# Altium PCB nuc5v1.PcbDoc
Units mm, origin at the board's own origin, x right, y up, seen from the top; angles counter-clockwise.
Board outline 152.4 x 101.6 mm, 2 copper layers (Top Layer, Bottom Layer); 67 components, 68 nets, 259 pads, 158 vias.
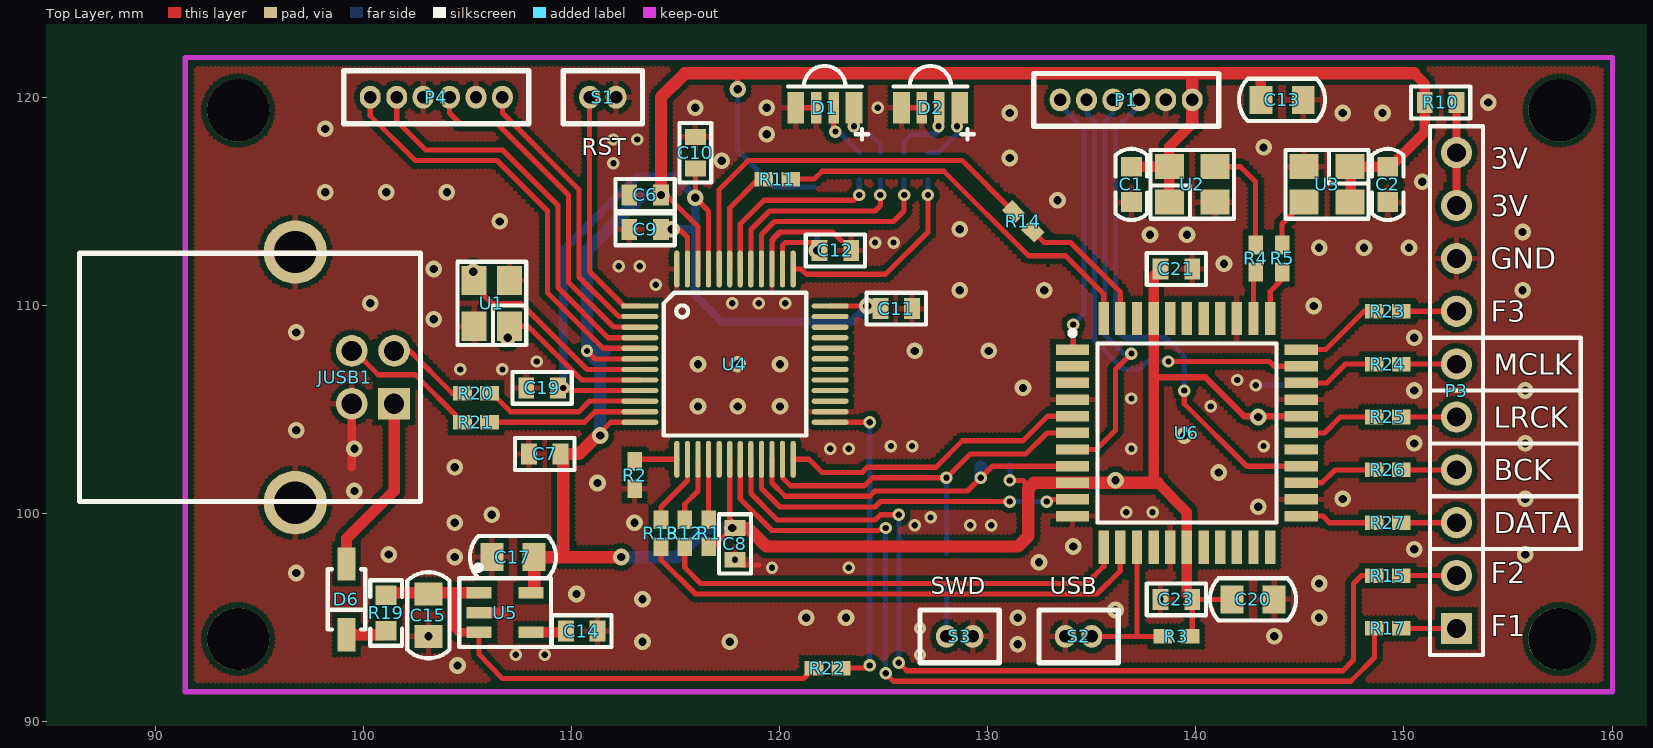
[diagram p0: Top Layer view]
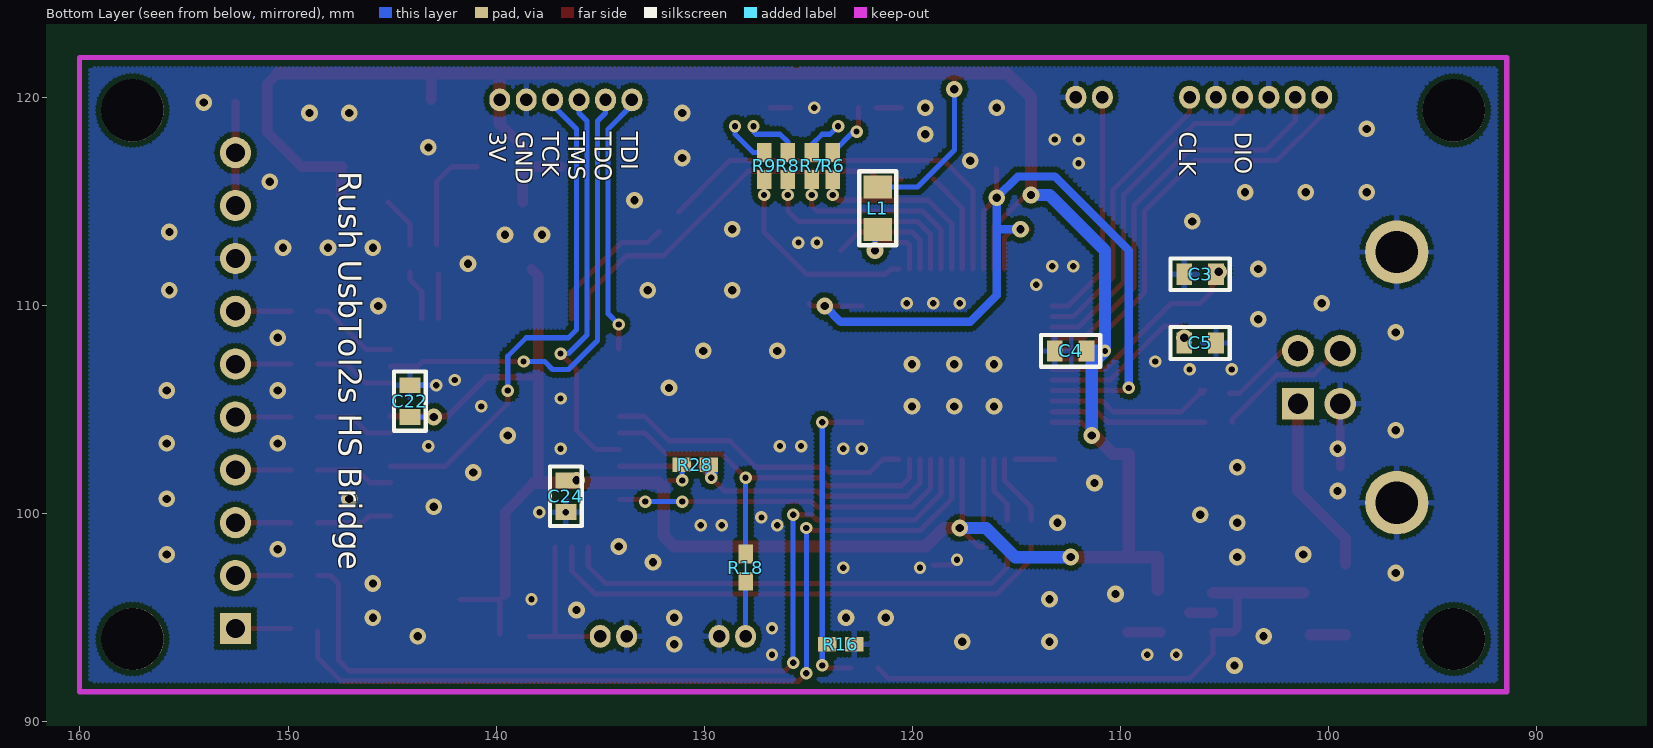
[diagram p1: Bottom Layer view, seen from below]

## Layer stack, top to bottom
Top Layer: signal copper 0.0356
Dielectric: dielectric 0.32, FR-4, Dk 4.8
Bottom Layer: signal copper 0.0356

## Board outline
25.4,25.4 177.8,25.4 177.8,127 25.4,127

## Design rules (kind name [scope] priority, off if disabled: settings)
Clearance Clearance_1 [All] p1: gap=0.254
Clearance [(InComponent('U1'))] p2: gap=0.1
ComponentClearance [All] p1 off: gap=0.254 collisioncheckmode=3 verticalgap=0.254
FanoutControl Fanout_BGA [IsBGA] p1 off: bgadir=Out bgaviamode=Centered fanoutstyle=Auto fanoutdirection=Alternating viagrid=0.025 // Fanout_BGA (Default Rule)
FanoutControl Fanout_LCC [IsLCC] p2 off: bgadir=Out bgaviamode=Centered fanoutstyle=Auto fanoutdirection=Alternating viagrid=0.025 // Fanout_LCC (Default Rule)
FanoutControl Fanout_SOIC [IsSOIC] p3 off: bgadir=Out bgaviamode=Centered fanoutstyle=Auto fanoutdirection=Alternating viagrid=0.025 // Fanout_SOIC (Default Rule)
FanoutControl Fanout_Small [(CompPinCount < 5)] p4 off: bgadir=Out bgaviamode=Centered fanoutstyle=Auto fanoutdirection=OutThenIn viagrid=0.025 // Fanout_Small (Default Rule)
FanoutControl Fanout_Default [All] p5 off: bgadir=Out bgaviamode=Centered fanoutstyle=Auto fanoutdirection=Alternating viagrid=0.025 // Fanout_Default (Default Rule)
Height [All] p1 off: minheight=0 maxheight=25.4 prefheight=12.7
HoleSize [All] p1 off: absolutevalues=TRUE maxlimit=2.54 minlimit=0.025 maxpercent=80.000 minpercent=20.000
LayerPairs [All] p1 off: enforce=TRUE
PasteMaskExpansion [All] p1 off: expansion=0
PolygonConnect [All] p1: connectstyle=Relief reliefconductorwidth=0.254 reliefentries=4 polygonreliefangle="90 Angle"
RoutingCorners [All] p1 off: cornerstyle=45-Degree minsetback=2.54 maxsetback=2.54
RoutingLayers [All] p1 off: top layer_v5=TRUE bottom layer_v5=TRUE
RoutingPriority [All] p1 off: routingpriority=0
RoutingTopology [All] p1 off: topology=Shortest
RoutingVias [All] p1: holewidth=0.711 width=1.27 viastyle="Through Hole" minholewidth=0.711 minwidth=1.27 maxholewidth=0.711 maxwidth=1.27
SolderMaskExpansion [All] p1 off: expansion=0.102
TestPointUsage [All] p1 off: valid=0 allowmultiple=FALSE
Testpoint [All] p1 off: side=15 testpointundercomponent=TRUE minsize=1.016 maxsize=2.54 preferedsize=1.524 minholesize=0 maxholesize=1.016 preferedholesize=0.813 testpointgrid=0.025 style=1023 order=0-112345678
Width [All] p1: maxlimit=1 minlimit=0.2 preferedwidth=0.3 toplayer_prefwidth=0.25 bottomlayer_prefwidth=0.25 minimp=50.000000 maximp=50.000000 favimp=50.000000
4 further rules are at their usual default settings.

## Components (designator, comment, footprint, x,y, rotation, side; value= is the part's Value field where it differs from the comment)
C1 "104" CC0603CAP 136.906,115.824 r90 top
C2 "104" CC0603CAP 149.225,115.824 r270 top
C3 "22p" 0603 105.41,111.506 r0 bottom
C4 "0.1" 0603 111.633,107.823 r0 bottom
C5 "22p" 0603 105.41,108.204 r0 bottom
C6 "0.1" 0603 114.3,115.316 r180 top
C7 "0.1" 0603 107.95,102.87 r0 top
C8 "0.1" 0603 117.856,99.314 r270 top
C9 "0.1" 0603 114.3,113.665 r180 top
C10 "0.1" 0603 115.951,116.586 r90 top
C11 "4.7u" 0603 124.841,109.855 r0 top
C12 "1" 0603 121.92,112.649 r0 top
C13 "10uF" CC0805CAP 144.145,119.888 r180 top
C14 "0.1" 0603 109.728,94.361 r0 top
C15 "10uF" CC0805CAP 103.124,95.123 r90 top
C17 "10uF" CC0805CAP 107.188,97.917 r0 top
C19 "0.1" 0603 109.347,106.045 r180 top
C20 "10u" CC0805CAP 142.748,95.885 r0 top
C21 "0.1" 0603 139.827,111.76 r180 top
C22 "0.1" 0603 144.145,106.172 r270 bottom
C23 "0.1" 0603 138.303,95.885 r0 top
C24 "0.1" 0603 136.652,100.076 r90 bottom
D1 "DLED" LED1204 122.174,119.507 r270 top
D2 "DLED" LED1204 127.254,119.507 r270 top
D6 "MBR520" SOD123 99.187,95.885 r90 top
JUSB1 "USB_B" USB-B-M 101.473,105.283 r90 top
L1 "10uH" CC0805RES 121.666,114.681 r270 bottom
P1 "Header 6" 密脚针1.27mm*6 133.477,119.888 r0 top
P3 "Header 10" HDR1X10 152.527,94.488 r90 top locked
P4 "Header 6" 密脚针1.27mm*6 100.33,120.015 r0 top
R1 "10K" CR1005-0402 116.586,99.06 r270 top
R2 "12.1K 1%" CR1005-0402 113.03,101.854 r270 top
R3 "1K" CR1005-0402 139.065,94.107 r0 top
R4 "22" CR1005-0402 142.875,112.268 r270 top
R5 "22" CR1005-0402 144.145,112.268 r270 top
R6 "2.2k" CR1005-0402 123.825,116.713 r90 bottom
R7 "10k" CR1005-0402 124.841,116.713 r90 bottom
R8 "2.2k" CR1005-0402 125.984,116.713 r90 bottom
R9 "10k" CR1005-0402 127.127,116.713 r90 bottom
R10 "0" 0603 151.003,119.761 r0 top
R11 "220" CR1005-0402 119.888,116.078 r0 top
R12 "220" CR1005-0402 115.443,99.06 r90 top
R13 "220" CR1005-0402 114.3,99.06 r270 top
R14 "220" CR1005-0402 131.699,114.046 r135 top
R15 "220" CR1005-0402 149.225,97.028 r180 top
R16 "20K" CR1005-0402 123.444,93.726 r0 bottom
R17 "220" CR1005-0402 149.225,94.488 r180 top
R18 "1K" CR1005-0402 128.016,97.409 r270 bottom
R19 "2.2" CC0603RES 101.092,95.231 r90 top
R20 "22" CR1005-0402 105.41,105.791 r180 top
R21 "22" CR1005-0402 105.41,104.394 r180 top
R22 "20K" CR1005-0402 122.301,92.583 r180 top
R23 "220" CR1005-0402 149.225,109.728 r0 top
R24 "220" CR1005-0402 149.225,107.188 r180 top
R25 "220" CR1005-0402 149.225,104.648 r180 top
R26 "220" CR1005-0402 149.225,102.108 r0 top
R27 "220" CR1005-0402 149.225,99.568 r0 top
R28 "10K" CR1005-0402 130.429,102.362 r0 bottom
S1 "RESET" 密脚针1.27mm*2 112.141,120.015 r180 top
S2 "USBOOT" 密脚针1.27mm*2 133.731,94.107 r0 top
S3 "SWBOOT" 密脚针1.27mm*2 129.286,94.107 r180 top
U1 "12M 3225" OSC-3225 106.172,110.109 r90 top
U2 "7050 OSC" OSC-3225 139.827,115.824 r0 top
U3 "7050 OSC" OSC-3225 146.304,115.824 r180 top
U4 "NUC505YL" LQFP-48 113.284,109.982 r270 top
U5 "LDO3.3V" SOT23-5 106.807,95.25 r90 top
U6 "EPM3032A" TQFP44 139.573,103.886 r0 top

## Footprints (in the part's own frame and the unit in brackets; to place one, negate y for a bottom-side part, rotate by r counter-clockwise, add the part's x,y. Pads: shape width x height; smd on the part's side, far side on the other; paste and mask are expansions set on the pad)
0603 [mil]
  rect 30x40 smd: 1(0,0) 2(60,0)
  silkscreen extent -26,-30 86,30
CC0603CAP [mm]
  rect 0.95x1 smd: 1(-0.85,0) 2(0.85,0)
  silkscreen extent -1.71,-0.76 1.71,0.76
CC0603RES [mm]
  rect 0.95x1 smd: 1(-0.85,0) 2(0.85,0)
  silkscreen extent -1.57,-0.76 1.57,0.76
CC0805CAP [mm] "Chip Capacitor; Body 2.0 x 1.2 mm (LxW typ)"
  rect 1.1x1.35 smd: 1(-1.016,0) 2(1.016,0)
  silkscreen extent -2.07,-1.02 2.07,1.02
CC0805RES [mm] "Chip Capacitor; Body 2.0 x 1.2 mm (LxW typ)"
  rect 1.1x1.35 smd: 1(-1.016,0) 2(1.016,0)
  silkscreen extent -1.78,-0.89 1.78,0.89
CR1005-0402 [mm] "Chip Resistor; Body 1.1 x 0.5 mm (LxW typ)"
  rect 0.9x0.7 smd: 1(-0.65,0) 2(0.65,0)
HDR1X10 [mm] "Connector; Header; 10 Position"
  rect 1.5x1.5 hole 0.9: 1(0,0)
  round 1.5 hole 0.9: 2(2.54,0) 3(5.08,0) 4(7.62,0) 5(10.16,0) 6(12.7,0) 7(15.24,0) 8(17.78,0) 9(20.32,0) 10(22.86,0)
  silkscreen extent -1.27,-1.27 24.13,1.27
LED1204 [mm]
  rect 1.5x0.5 smd: 1(0,-0.42) 2(0,0.42)
  rect 1.5x0.8 smd: 3(0,-1.4) 4(0,1.4)
  silkscreen extent -2.01,-1.78 1.52,2.08
LQFP-48 [mil]
  rect 10x70 smd: 1(0,0)
  oval 10x70 smd: 2(20,0) 3(40,0) 4(60,0) 5(80,0) 6(100,0) 7(120,0) 8(140,0) 9(160,0) 10(180,0) 11(200,0) 12(220,0) 25(220,360) 26(200,360) 27(180,360) 28(160,360) 29(140,360) 30(120,360) 31(100,360) 32(80,360) 33(60,360) 34(40,360) 35(20,360) 36(0,360)
  oval 70x10 smd: 13(290,70) 14(290,90) 15(290,110) 16(290,130) 17(290,150) 18(290,170) 19(290,190) 20(290,210) 21(290,230) 22(290,250) 23(290,270) 24(290,290) 37(-70,290) 38(-70,270) 39(-70,250) 40(-70,230) 41(-70,210) 42(-70,190) 43(-70,170) 44(-70,150) 45(-70,130) 46(-70,110) 47(-70,90) 48(-70,70)
  silkscreen extent -25,45 245,315
OSC-3225 [mm] "3225晶振"
  rect 1.4x1.2 smd: 1(-1.1,-0.85) 2(1.1,-0.85) 3(1.1,0.85) 4(-1.1,0.85)
  silkscreen extent -2,-1.65 2,1.65
SOD123 [mm] "SOD-123; 2 Leads; Body 2.7 x 1.6 mm, (LxW)"
  rect 1.6x0.85 smd: 1(1.7,0) 2(-1.7,0)
  silkscreen extent -1.45,-0.9 1.45,0.9
SOT23-5 [mm] "SOT-23/SC-74A; 5 Leads; Body 3.1 x 3.1 mm, inc. leads (LxW max)"
  rect 0.55x1.2 smd: 1(0.95,1.25) 2(0,1.25) 3(-0.95,1.25) 4(-0.95,-1.25) 5(0.95,-1.25)
  silkscreen extent -1.65,-2.2 2.29,2.2
TQFP44 [mm] "44-Pin Plastic Thin Quad Flat Pack (TFQP)"
  rect 1.6x0.5 smd: 1(-5.5,4) 2(-5.5,3.2) 3(-5.5,2.4) 4(-5.5,1.6) 5(-5.5,0.8) 6(-5.5,0) 7(-5.5,-0.8) 8(-5.5,-1.6) 9(-5.5,-2.4) 10(-5.5,-3.2) 11(-5.5,-4) 23(5.5,-4) 24(5.5,-3.2) 25(5.5,-2.4) 26(5.5,-1.6) 27(5.5,-0.8) 28(5.5,0) 29(5.5,0.8) 30(5.5,1.6) 31(5.5,2.4) 32(5.5,3.2) 33(5.5,4)
  rect 0.5x1.6 smd: 12(-4,-5.5) 13(-3.2,-5.5) 14(-2.4,-5.5) 15(-1.6,-5.5) 16(-0.8,-5.5) 17(0,-5.5) 18(0.8,-5.5) 19(1.6,-5.5) 20(2.4,-5.5) 21(3.2,-5.5) 22(4,-5.5) 34(4,5.5) 35(3.2,5.5) 36(2.4,5.5) 37(1.6,5.5) 38(0.8,5.5) 39(0,5.5) 40(-0.8,5.5) 41(-1.6,5.5) 42(-2.4,5.5) 43(-3.2,5.5) 44(-4,5.5)
  silkscreen extent -5.62,-4.3 4.3,4.92
USB-B-M [mil]
  rect 60x60 hole 38: 1(0,0)
  round 60 hole 38: 2(100,0) 3(100,80) 4(0,80)
  round 120 hole 80: 5(-187,187) 5(287,187)
  silkscreen extent -185,-50 285,595
密脚针1.27mm*2 [mm]
  oval 1x1.1 hole 0.6: 1(0,0) 2(1.27,0)
  silkscreen extent -1.27,-1.27 2.54,1.27
密脚针1.27mm*6 [mm]
  oval 1x1.1 hole 0.6: 1(0,0) 2(1.27,0) 3(2.54,0) 4(3.81,0) 5(5.08,0) 6(6.35,0)
  silkscreen extent -1.27,-1.27 7.62,1.27

## Part data
C1 C2: library part Cap6, "Capacitor0603"
C3 C4 C5 C6 C7 C8 C9 C10 C11 C12 C19 C21 C22 C23 C24: library part CAP, "Capacitor"
C13 C14 C15 C17 C20: library part Cap8, "Capacitor0805"
D1 D2: library part LED1204, "1204˫ɫLED"
D6: library part Diode, "Default Diode"
JUSB1: "USB Mini/Micro 5P"
L1: library part Res8, "Resistor0805"
P1 P4: "Header, 6-Pin"
P3: "Header, 10-Pin"
R1 R2 R3 R4 R5 R6 R7 R8 R9 R10 R11 R12 R13 R14 R15 R17 R18 R19 R20 R21 R23 R24 R25 R26 R27 R28: library part Res6, "Resistor0603"
R16 R22: library part R, "贴片电阻"
S1 S2 S3: library part SW-PB
U1: library part XTAL
U2 U3: library part XTAL_OSC
U5: library part LP2985-5, "LP2985 5V LDO"
U6: "CPLD , 44-Pin TQFP"

## Free pads (board coordinates)
  round 3 hole 3 unplated: ""(93.98,93.98) ""(93.98,119.38) ""(157.48,93.98) ""(157.48,119.38)

## Via types
v1: diameter 0.8, hole 0.4, Top Layer to Bottom Layer, 94 vias
v2: diameter 0.6, hole 0.3, Top Layer to Bottom Layer, 64 vias

## Nets (pads, with @x,y where several pads share a name; then routed paths per layer and width w, separated by ;. In a path a pad name is that pad's centre, name@x,y a point inside that pad or via, vN(x,y) a via of type N, cw(c..) or ccw(c..) an arc to the next point about the centre after c; other vN are vias at no path point)
BCK1: R12.1 U6.12 | length 22.7
  Top Layer w0.25: R12.1 115.443,97.409 116.205,96.647 134.747,96.647 135.573,97.473 U6.12
BCK2: R26.1 U6.25 | length 3.8
  Top Layer w0.25: U6.25 146.063,101.486 146.685,102.108 R26.1
BCKO: P3.4 R26.2 | length 2.7
  Top Layer w0.25: R26.2 P3.4
CLK1: R4.1 U2.3 | length 5.3
  Top Layer w0.25: U2.3 142.152,116.674 142.875,115.951 R4.1
CLK1O: R4.2 U6.35 | length 2.1
  Top Layer w0.25: U6.35 R4.2@142.773,111.516
CLK2: R5.1 U3.3 | length 2.5
  Top Layer w0.25: R5.1 144.145,113.915 U3.3
CLK2O: R5.2 U6.34 | length 2.5
  Top Layer w0.25: U6.34 143.573,110.68 144.145,111.252 R5.2
D+: R21.1 U4.11 | length 7.6
  Top Layer w0.25: R21.1@105.933,104.394 110.617,104.394 111.125,104.902 U4.11
D-: R20.1 U4.10 | length 8.1
  Top Layer w0.25: R20.1@105.933,105.918 R20.1@106.172,105.918 ; R20.1@106.045,105.791 106.172,105.791 107.061,104.902 110.363,104.902 110.871,105.41 U4.10
DATAO: P3.3 R27.2 | length 2.7
  Top Layer w0.25: R27.2 P3.3
DATI: R11.2 U6.44 | length 18.8
  Top Layer w0.25: R11.2 121.666,116.078 122.047,116.459 127.889,116.459 131.953,112.395 133.731,112.395 135.573,110.553 U6.44
DATO: R14.1 U6.43 | length 6.7
  Top Layer w0.25: R14.1 132.715,113.03 133.985,113.03 136.373,110.642 U6.43
DM: JUSB1.2 R20.2 | length 4
  Top Layer w0.254: JUSB1.2@101.6,107.823 102.235,107.823 104.267,105.791 R20.2
DP: JUSB1.3 R21.2 | length 6.6
  Top Layer w0.254: JUSB1.3@99.568,107.823 100.711,106.68 102.489,106.68 104.633,104.536 R21.2@104.633,104.394
F1: P3.1 R17.1 | length 2.7
  Top Layer w0.25: R17.1 P3.1
F2: P3.2 R15.1 | length 2.7
  Top Layer w0.25: R15.1 P3.2
F3: P3.7 R23.2 | length 2.7
  Top Layer w0.25: R23.2 P3.7
GND: C1.1 C2.2 C3.2 C4.2 C5.1 C6.2 C7.1 C8.2 C9.2 C10.2 C11.2 C12.2 C13.1 C14.2 C15.1 C17.1 C19.2 C20.2 C21.1 C22.1 C23.1 C24.1 D1.1 D1.3 D2.1 D2.3 JUSB1.4 JUSB1.5 P1.5 P3.8 P4.3 P4.5 R2.2 R16.1 S1.1 S2.1 S3.1 U1.2 U1.4 U2.2 U3.2 U4.26 U4.39 U4.48 U5.2 U6.4 U6.11 U6.16 U6.24 U6.30 U6.36 | length 14.5
  Top Layer w0.25: v2(117.856,97.79) 118.11,97.536 118.999,97.536 ; U4.39 119.634,113.157 120.015,113.538 122.555,113.538 C12.2 ; D1.3@120.523,119.507 D1.1 ; D2.3 D2.1
  Top Layer w0.4: 99.441,102.231 JUSB1.4
  Top Layer w0.5: U5.2 106.705,95.25
  Bottom Layer w0.25: v2@143.002,106.172 C22.1
  other v1: 104.521,92.71 131.445,93.726 113.411,93.853 117.602,93.853 103.124,94.107 143.764,94.107 121.285,94.996 123.19,94.996 131.445,94.996 145.923,94.996 136.144,95.377 113.411,95.885 110.236,96.139 145.923,96.647 96.774,97.155 132.461,97.663 104.394,97.917 101.219,98.044 155.829,98.044 150.495,98.298 134.112,98.425 104.394,99.568 113.03,99.568 106.172,99.949 143.002,100.33 147.066,100.711 155.829,100.711 99.568,101.092 111.252,101.473 141.097,101.981 104.394,102.235 99.568,103.124 150.495,103.378 155.829,103.378 139.446,103.759 96.774,104.013 116.078,105.156 117.983,105.156 120.015,105.156 150.495,105.918 155.829,105.918 131.699,106.045 116.078,107.188 117.983,107.188 120.015,107.188 126.492,107.823 130.048,107.823 150.495,108.458 96.774,108.712 103.378,109.347 145.669,109.982 100.33,110.109 128.651,110.744 132.715,110.744 155.702,110.744 103.378,111.76 141.351,112.014 145.923,112.776 148.082,112.776 150.241,112.776 137.795,113.411 139.573,113.411 155.702,113.538 128.651,113.665 106.553,114.046 133.35,115.062 98.171,115.443 101.092,115.443 104.013,115.443 150.876,115.951 117.221,116.967 131.064,117.094 143.256,117.602 119.38,118.237 98.171,118.491 131.064,119.253 147.066,119.253 148.971,119.253 115.951,119.507 119.38,119.507 154.051,119.761
  other v2: 107.315,93.218 108.712,93.218 126.746,93.218 126.746,94.488 138.303,95.885 119.634,97.409 123.317,97.409 126.492,99.441 129.159,99.441 130.175,99.441 127.254,99.822 136.652,100.076 137.922,100.076 122.428,103.124 123.317,103.124 136.906,103.124 125.349,103.251 126.365,103.251 143.256,103.251 140.716,105.156 136.906,105.537 142.875,106.172 141.986,106.426 104.648,106.934 106.68,106.934 108.331,107.315 117.729,110.109 118.999,110.109 120.269,110.109 114.046,110.998 112.268,111.887 113.284,111.887 124.587,113.03 125.476,113.03 112.014,116.84 112.014,117.983 113.157,117.983 124.714,119.507
HSE-I: C3.1 U1.3 U4.7 | length 9.9
  Top Layer w0.25: U1.3 105.62,110.911 105.62,110.661 106.172,110.109 107.569,110.109 110.744,106.934 U4.7
  other v1: 105.283,111.633
HSE-O: C5.2 U1.1 U4.8 | length 7.3
  Top Layer w0.25: U1.1 107.907,109.009 110.49,106.426 U4.8
  other v1: 106.934,108.458
LRCK1: R13.2 U6.13 | length 25
  Top Layer w0.25: R13.2 114.3,97.79 115.951,96.139 135.255,96.139 136.373,97.257 U6.13
LRCK2: R25.2 U6.28 | length 3.8
  Top Layer w0.25: U6.28 146.177,103.886 146.939,104.648 R25.2
LRCKO: P3.5 R25.1 | length 2.7
  Top Layer w0.25: R25.1 P3.5
MCLK2: R24.2 U6.31 | length 3.9
  Top Layer w0.25: U6.31 146.291,106.286 147.193,107.188 R24.2
MCLKO: P3.6 R24.1 | length 2.7
  Top Layer w0.25: R24.1 P3.6
NetC14_1: C14.1 U5.4 | length 1.7
  Top Layer w0.25: C14.1@109.667,94.3 C14.1
  Top Layer w0.5: U5.4 C14.1@109.667,94.3
NetC15_2: C15.2 R19.2 R22.2 U5.1 U5.3 | length 25.2
  Top Layer w0.25: U5.3 105.557,93.249 106.68,92.075 121.143,92.075 R22.2
  Top Layer w0.4: 104.394,96.2 104.394,94.488 104.582,94.3 U5.3
  Top Layer w0.55: R19.2@101.192,96.2 U5.1
NetD1_2: D1.2 R6.2 | length 2.6
  Top Layer w0.25: v2@122.594,118.452 D1.2
  Bottom Layer w0.25: v2(122.682,118.364) 122.824,118.364 R6.2
NetD1_4: D1.4 R7.2 | length 2
  Bottom Layer w0.25: v2(123.571,118.618) 123.952,118.237 124.333,118.237 124.841,117.729 R7.2
NetD2_2: D2.2 R8.2 | length 2.6
  Bottom Layer w0.25: R8.2 125.984,117.856 126.365,118.237 127.508,118.237 127.635,118.364 v2(127.635,118.618)
NetD2_4: D2.4 R9.2 | length 2.1
  Bottom Layer w0.25: R9.2 127.65,117.363 128.524,118.237 v2(128.524,118.618)
NetP3_9: P3.9 P3.10 R10.2 | length 5
  Top Layer w0.4: P3.9 R10.2
NetR2_1: R2.1 U4.13 | length 1.9
  Top Layer w0.25: R2.1@113.172,102.616 U4.13
PA0: R8.1 U4.40 | length 10.5
  Top Layer w0.25: U4.40 119.126,113.411 119.761,114.046 125.476,114.046 125.984,114.554 v2(125.984,115.316)
  Bottom Layer w0.25: v2(125.984,115.316) R8.1
PA1: R7.1 U4.41 | length 9.9
  Top Layer w0.25: U4.41 118.618,113.665 119.507,114.554 124.587,114.554 124.841,114.808 v2(124.841,115.316)
  Bottom Layer w0.25: v2(124.841,115.316) R7.1
PA2: R6.1 U4.42 | length 9.2
  Top Layer w0.25: U4.42 118.11,113.919 119.253,115.062 123.571,115.062 v2(123.825,115.316)
  Bottom Layer w0.25: v2(123.825,115.316) R6.1
PA3: R11.1 U4.43 | length 4.9
  Top Layer w0.25: U4.43 117.602,114.696 R11.1@118.984,116.078
PA4: R14.2 U4.44 | length 19.6
  Top Layer w0.25: U4.44 117.094,115.57 118.491,116.967 128.778,116.967 R14.2
PA8: R13.1 U4.14 | length 3.4
  Top Layer w0.25: R13.1 114.3,100.33 115.57,101.6 U4.14
PA9: R12.2 U4.15 | length 3.2
  Top Layer w0.25: R12.2 115.443,100.457 116.078,101.092 U4.15
PA10: R1.1 U4.16 | length 2.9
  Top Layer w0.25: R1.1 U4.16
PA11: U4.17
PB0: R17.2 U4.19 | length 42.1
  Top Layer w0.25: U4.19 118.11,100.711 119.634,99.187 124.714,99.187 v2(125.095,99.314) ; v2(125.095,92.329) 125.476,91.948 147.447,91.948 148.59,93.091 R17.2@148.59,94.361
  Bottom Layer w0.25: v2@125.095,92.202 v2(125.095,99.314)
PB1: R15.2 U4.20 | length 43.7
  Top Layer w0.25: U4.20 118.618,100.965 119.888,99.695 124.587,99.695 124.841,99.949 v2(125.73,99.949) ; v2(125.73,92.837) 126.111,92.456 147.066,92.456 147.574,92.964 147.574,96.647 147.955,97.028 R15.2@148.59,97.028
  Bottom Layer w0.25: v2@125.73,92.71 v2(125.73,99.949)
PB2: U4.21 U6.10 | length 16.9
  Top Layer w0.25: U4.21 119.126,101.219 120.015,100.33 124.587,100.33 124.841,100.584 v2(131.064,100.584) ; v2@132.867,100.686 U6.10
  Bottom Layer w0.25: v2@130.937,100.584 v2(132.842,100.584)
PB3: R28.1 U4.22 U6.8 | length 17.1
  Top Layer w0.25: U4.22 119.634,101.473 120.269,100.838 124.333,100.838 124.587,101.092 129.032,101.092 130.226,102.286 U6.8
  Bottom Layer w0.25: R28.1@129.667,102.25 R28.1
  Bottom Layer w0.6: v2(129.667,101.727) R28.1@129.667,102.25
PB4: R18.1 U4.23 U6.6 | length 19.7
  Top Layer w0.25: U4.23 120.142,101.727 120.523,101.346 124.079,101.346 124.46,101.727 v2(128.016,101.727) 129.159,102.87 131.826,102.87 132.842,103.886 U6.6
  Bottom Layer w0.25: R18.1 v2(128.016,101.727)
PB5: U4.24 U6.5 | length 14.8
  Top Layer w0.25: U4.24 121.412,102.616 122.047,101.981 123.952,101.981 124.206,102.235 127.508,102.235 128.778,103.505 131.699,103.505 132.88,104.686 U6.5
PB14: P4.2 U4.4 | length 19.4
  Top Layer w0.25: P4.2 101.6,118.872 102.997,117.475 106.68,117.475 109.347,114.808 109.347,110.871 111.76,108.458 U4.4
PB15: P4.1 U4.5 | length 20.8
  Top Layer w0.25: P4.1 100.33,119.126 102.489,116.967 106.426,116.967 108.839,114.554 108.839,110.617 111.506,107.95 U4.5
PD4: R9.1 U4.37 | length 9.9
  Top Layer w0.25: U4.37 121.031,111.76 121.285,111.506 125.095,111.506 127.127,113.538 v2(127.127,115.316)
  Bottom Layer w0.25: v2(127.127,115.316) R9.1
RST: S1.2 U4.1 | length 11.5
  Top Layer w0.25: S1.2 110.871,111.633 112.522,109.982 U4.1
SCFG0SET: R3.1 S2.2 U6.14 | length 7.7
  Top Layer w0.25: S2.2 R3.1 ; 137.173,94.12 U6.14
SDI2: R23.1 U6.33 | length 4.3
  Top Layer w0.25: U6.33 146.24,107.886 148.082,109.728 R23.1
SDO2: R27.1 U6.23 | length 3.6
  Top Layer w0.25: U6.23 146.113,99.886 146.431,99.568 R27.1
SWCLK: P4.6 U4.2 | length 13.9
  Top Layer w0.25: P4.6 106.68,119.253 110.363,115.57 110.363,111.379 112.268,109.474 U4.2
SWDAT: P4.4 U4.3 | length 16.6
  Top Layer w0.25: P4.4 104.14,119.253 104.648,118.745 106.426,118.745 109.855,115.316 109.855,111.125 112.014,108.966 U4.3
SYSCFG3: R18.2 S3.2 | length 2.7
  Bottom Layer w0.25: S3.2 R18.2
TCK: P1.4 U6.26 | length 24.3
  Top Layer w0.25: v2(139.446,105.918) 139.446,105.283 142.443,102.286 U6.26
  Bottom Layer w0.25: P1.4 137.287,119.634 136.144,118.491 136.144,108.839 136.525,108.458 138.557,108.458 139.446,107.569 v2@139.446,106.172
TDI: P1.1 U6.1 | length 12.7
  Top Layer w0.25: U6.1@134.112,107.925 v2(134.112,109.093)
  Bottom Layer w0.25: P1.1 133.477,119.634 134.633,118.478 134.633,109.614 v2(134.112,109.093)
TDO: P1.2 U6.32 | length 22.5
  Top Layer w0.25: v2(138.684,107.315) 143.535,107.315 143.764,107.086 U6.32
  Bottom Layer w0.25: P1.2 134.747,119.253 135.128,118.872 135.128,108.331 136.525,106.934 137.287,106.934 137.668,107.315 v2(138.684,107.315)
TMS: P1.3 U6.7 | length 19.6
  Top Layer w0.25: U6.7 135.217,103.086 136.144,104.013 136.144,106.934 v2(136.906,107.696)
  Bottom Layer w0.25: P1.3 136.017,119.253 135.636,118.872 135.636,108.585 136.525,107.696 v2(136.906,107.696)
UDET: R16.2 R22.1 U4.25 | length 14.8
  Top Layer w0.25: U4.25 v2(124.333,104.394) ; R22.1 v2@124.206,92.583
  Bottom Layer w0.25: v2(124.333,92.71) v2(124.333,104.394)
VBUS: D6.1 JUSB1.1 | length 8.5
  Top Layer w0.55: D6.1 99.187,98.806 101.473,101.092 JUSB1.1@101.473,105.156
VCC_1V2: C9.1 C10.1 C11.1 C19.1 U4.9 U4.36 U4.45 U4.47 | length 44
  Top Layer w0.25: v2(109.601,106.045) 109.728,105.918 U4.9 ; C9.1@114.427,113.665 115.189,113.665 115.57,113.284 U4.47 ; C10.1 v1(115.951,115.189) 116.586,114.554 U4.45 ; U4.36 124.841,109.982 C11.1@124.968,110.109
  Bottom Layer w0.4: v2(109.601,106.045) 109.601,112.649 113.157,116.205 114.935,116.205 v1(115.951,115.189) 115.951,110.49 117.221,109.22 123.444,109.22 v1(124.206,109.982) ; v1(114.808,113.665) 115.951,113.665
VDD: C1.2 C2.1 C4.1 C6.1 C7.2 C8.1 C13.2 C17.2 C20.1 C21.2 C22.2 C23.2 C24.2 L1.1 P1.6 R1.2 R3.2 R10.1 R28.2 U2.1 U2.4 U3.1 U3.4 U4.6 U4.12 U4.18 U4.46 U5.5 U6.9 U6.17 U6.29 U6.41 | length 169.9
  Top Layer w0.25: v2(110.744,107.823) 111.125,107.442 U4.6 ; v1@111.252,103.759 111.887,104.394 U4.12 ; v1(112.395,97.917) v1@112.522,97.79 ; v1(114.3,115.316) 114.554,115.316 116.078,113.792 U4.46 ; R1.2 116.825,98.41 C8.1@117.602,99.187 ; C8.1@117.602,99.441 U4.18 ; C8.1@117.602,99.568 C8.1 ; v1(117.983,120.396) 117.983,121.158 ; v2(131.064,101.6) 131.699,101.6 132.08,101.219 ; C23.2@139.573,96.139 C23.2 ; R3.2@139.827,94.219 C23.2 ; C20.1 C23.2
  Top Layer w0.3: 137.973,106.553 140.462,106.553 142.329,104.686 U6.29
  Top Layer w0.5: C1.2 U2.4 ; 137.973,101.524 137.973,111.43 C21.2 ; 138.163,101.486 139.573,100.076 C23.2@139.573,96.139 ; U2.1 138.727,117.645 139.827,118.745 ; C13.2 143.129,121.031 ; U3.1 149.352,116.674 151.003,118.325 151.003,120.65 150.495,121.158 ; U3.4@147.447,115.316 U3.1@147.447,116.631
  Top Layer w0.6: U5.5@108.204,96.347 C17.2 v1(112.395,97.917) ; 109.601,97.917 109.601,102.87 110.363,102.87 v1@111.252,103.759 ; v1(114.3,115.316) 114.3,120.015 115.443,121.158 150.495,121.158 ; C8.1 118.491,99.314 119.38,98.425 124.46,98.425 124.968,98.425 131.445,98.425 131.953,98.933 131.953,101.219 132.22,101.486 138.163,101.486 ; 139.827,118.745 139.827,121.031
  Bottom Layer w0.25: v1(117.983,120.396) 117.983,117.475 119.761,115.697 L1.1 ; v2(131.064,101.6) 131.064,102.347 R28.2 ; v1(143.002,104.648) C22.2
  Bottom Layer w0.6: v1(111.379,103.759) 111.379,107.188 v2(110.744,107.823) ; C4.1 v2(110.744,107.823) ; v1(112.395,97.917) 115.062,97.917 116.459,99.314 v1(117.729,99.314) ; v1(114.3,115.316) 113.411,115.316 110.744,112.649 v2(110.744,107.823)
  other v1: 136.144,101.613
VDDA: C12.1 L1.2 U4.38 | length 4
  Top Layer w0.25: U4.38 120.142,112.903 120.269,113.03 121.666,113.03 C12.1@121.92,112.776
  Bottom Layer w0.25: v1(121.793,112.649) L1.2@121.793,113.538
VIN: D6.2 R19.1 | length 1.7
  Top Layer w0.55: D6.2 R19.1@100.877,94.185
pads on no net: U4.27 U4.28 U4.29 U4.30 U4.31 U4.32 U4.33 U4.34 U4.35 U6.2 U6.3 U6.15 U6.18 U6.19 U6.20 U6.21 U6.22 U6.27 U6.37 U6.38 U6.39 U6.40 U6.42

## Polygon pours and split planes (outlines as drawn)
GND on Top Layer (hatched 90Degree grid 0 track 0.203, remove dead copper): 91.948,121.412 91.948,91.948 159.512,91.948 159.512,121.412
GND on Bottom Layer (hatched 90Degree grid 0 track 0.203, remove dead copper): 91.948,121.412 91.948,91.948 159.512,91.948 159.512,121.412

## Keep-outs
Keep-Out Layer:
  lines w0.254: 91.44,91.44 91.44,121.92 160.02,121.92 160.02,91.44 91.44,91.44

## Silkscreen, mask and mechanical layers (free items; w line width, h text height)
Top Overlay:
  lines w0.2: 151.257,98.298 158.496,98.298 158.496,108.458 151.257,108.458 ; 151.257,100.838 158.496,100.838 ; 151.257,103.378 158.496,103.378 ; 151.257,105.918 158.496,105.918
  text "RST" at 110.49,117.221 h0.8
  text "3V" at 154.178,116.586 h1
  text "3V" at 154.178,114.3 h1
  text "GND" at 154.178,111.76 h1
  text "F3" at 154.178,109.22 h1
  text "MCLK" at 154.305,106.68 h1
  text "LRCK" at 154.305,104.14 h1
  text "BCK" at 154.305,101.6 h1
  text "DATA" at 154.305,99.06 h1
  text "F2" at 154.178,96.647 h1
  text "SWD" at 127.254,96.139 h0.8
  text "USB" at 132.969,96.139 h0.8
  text "F1" at 154.178,94.107 h1
Bottom Overlay:
  text "DIO" at 104.521,118.364 h0.8 r90
  text "CLK" at 107.188,118.364 h0.8 r90
  text "TDI" at 133.985,118.364 h0.8 r90
  text "TDO" at 135.255,118.364 h0.8 r90
  text "TMS" at 136.525,118.364 h0.8 r90
  text "TCK" at 137.795,118.364 h0.8 r90
  text "GND" at 139.065,118.364 h0.8 r90
  text "3V" at 140.335,118.364 h0.8 r90
  text "Rush UsbToI2s HS Bridge" at 147.574,116.459 h1.1 r90